# Altium PCB PCB1.PcbDoc
Units mil, origin at the board's own origin, x right, y up, seen from the top; angles counter-clockwise.
Board outline 6000 x 4000 mil, 2 copper layers (Top Layer, Bottom Layer); 22 components, 21 nets, 110 pads, 9 vias.
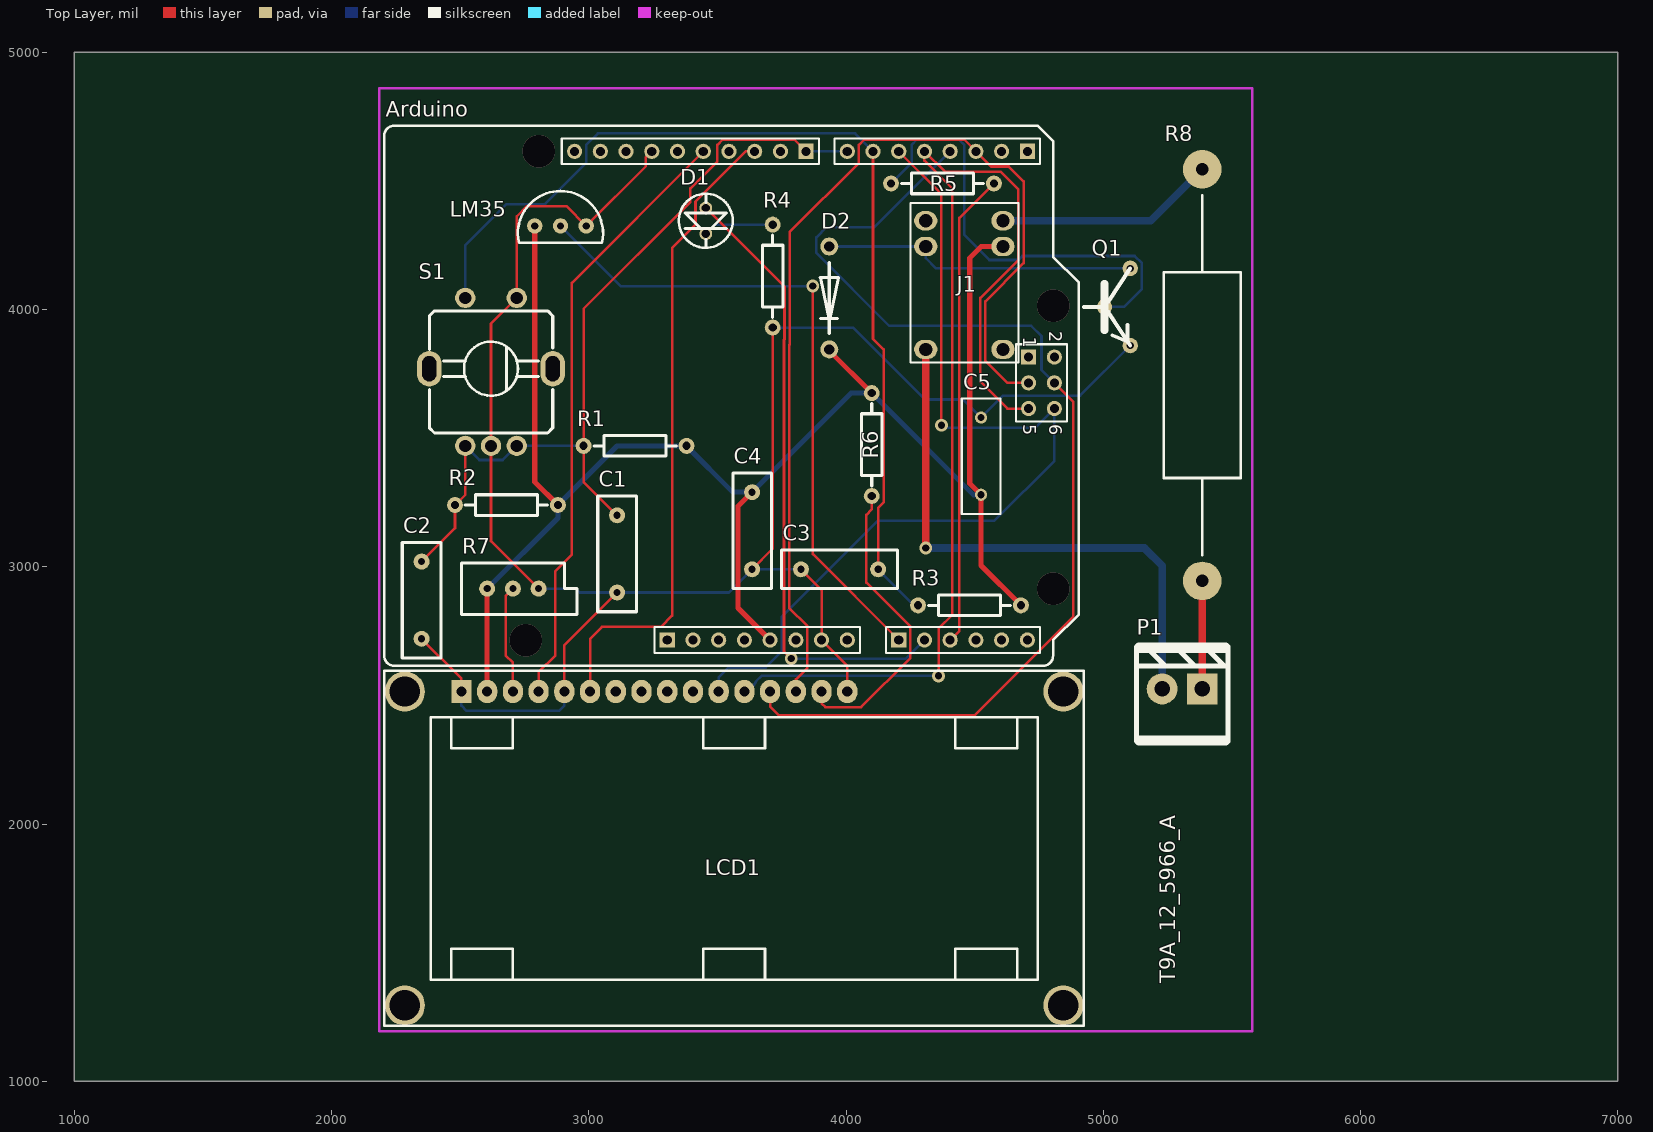
[diagram p0: Top Layer view]
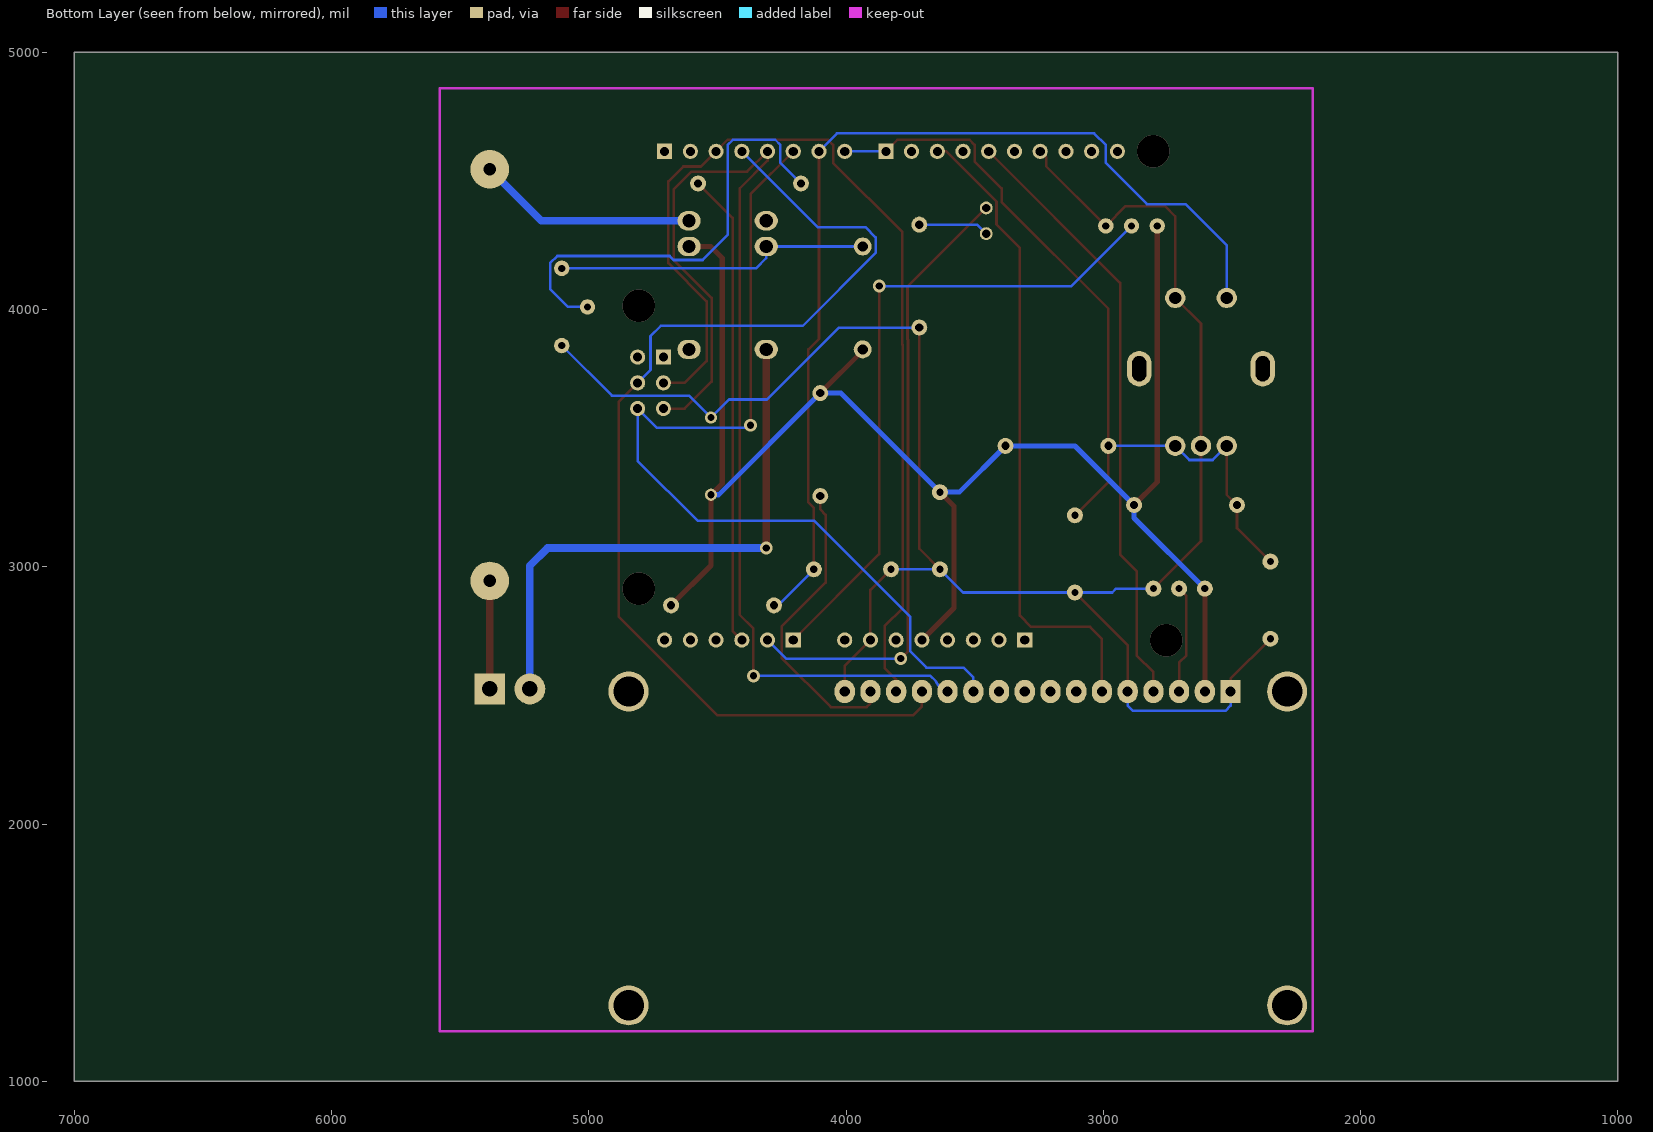
[diagram p1: Bottom Layer view, seen from below]

## Layer stack, top to bottom
Top Layer: signal copper 1.4
Dielectric: dielectric 12.6, FR-4, Dk 4.8
Bottom Layer: signal copper 1.4

## Board outline
1000,1000 7000,1000 7000,5000 1000,5000

## Design rules (kind name [scope] priority, off if disabled: settings)
Clearance [All] p1: gap=10
HoleSize [All] p1: absolutevalues=TRUE maxlimit=1000 minlimit=0 maxpercent=80.000 minpercent=20.000
PolygonConnect [All] p1: connectstyle=Relief reliefconductorwidth=10 reliefentries=4 polygonreliefangle="90 Angle"
RoomDefinition Sheet1 [InComponentClass('Sheet1')] p1: confinementstyle=ConfineIn formatcopy=TRUE lockcomponents=FALSE outline 2185,1195 5580,1195 5580,4860 2185,4860
RoutingVias [All] p1: holewidth=28 width=50 viastyle="Through Hole" minholewidth=28 minwidth=50 maxholewidth=28 maxwidth=50
SilkToSilkClearance [All] p1: silktosilkclearance=0
SilkscreenOverComponentPads SilkToSolderMaskClearance [IsPad] p1: minsilkscreentomaskgap=0
SolderMaskExpansion [All] p1: expansion=4
TestPointUsage FabricationTestPointUsage [All] p1: valid=0 allowmultiple=FALSE
Testpoint FabricationTestpoint [All] p1: side=3 testpointundercomponent=TRUE minsize=40 maxsize=100 preferedsize=60 minholesize=0 maxholesize=40 preferedholesize=32 testpointgrid=1 style=297 order=0123456789
Width Heat_GND [InNet('GND_HEAT')] p1: maxlimit=30 minlimit=10 preferedwidth=10 toplayer_minwidth=20 toplayer_prefwidth=30 bottomlayer_minwidth=20 bottomlayer_prefwidth=30 minimp=50.000000 maximp=50.000000 favimp=50.000000
Width Heat [InNet('HEAT')] p2: maxlimit=30 minlimit=10 preferedwidth=10 toplayer_minwidth=20 toplayer_prefwidth=30 bottomlayer_minwidth=20 bottomlayer_prefwidth=30 minimp=50.000000 maximp=50.000000 favimp=50.000000
Width 12V [InNet('12V')] p3: maxlimit=30 minlimit=10 preferedwidth=10 toplayer_minwidth=20 toplayer_prefwidth=30 bottomlayer_minwidth=20 bottomlayer_prefwidth=30 minimp=50.000000 maximp=50.000000 favimp=50.000000
Width 5V [InNet('ARDUINO_5V')] p4: maxlimit=20 minlimit=10 preferedwidth=10 toplayer_minwidth=15 toplayer_prefwidth=20 bottomlayer_minwidth=15 bottomlayer_prefwidth=20 minimp=50.000000 maximp=50.000000 favimp=50.000000
Width GND [InNet('GND')] p5: maxlimit=20 minlimit=10 preferedwidth=10 toplayer_minwidth=15 toplayer_prefwidth=20 bottomlayer_minwidth=15 bottomlayer_prefwidth=20 minimp=50.000000 maximp=50.000000 favimp=50.000000
Width [All] p6: maxlimit=10 minlimit=10 preferedwidth=10
21 further rules are at their usual default settings.

## Components (designator, comment, footprint, x,y, rotation, side; value= is the part's Value field where it differs from the comment)
Arduino "Arduino" Arduino-UNO 3845,3665 r0 top
C1 "Cap" RAD-0.3#1 3110,3200 r270 top
C2 "Cap" RAD-0.3#1 2350,3020 r270 top
C3 "Cap" RAD-0.3#1 3825,2990 r0 top
C4 "Cap" RAD-0.3#1 3635,2990 r90 top
C5 "Cap" RAD-0.3#2 4525,3430 r90 top
D1 "LED" LEDLXH-5 3455,4395 r0 top
D2 "DIODE" DIODE-4 3935,4245 r270 top
J1 "HK4100F" HK4100F 4460,4145 r0 top
LCD1 "LCD1602" LCD1602 2505,2515 r0 top
LM35 "LM35" LM35 2790,4325 r90 top
P1 "Header 2" "POWER PLUG2" 5385,2525 r0 top
Q1 "NPN" NPN-2 5105,3860 r0 top
R1 "Res2" AXIAL-0.4 3380,3470 r180 top
R2 "Res2" AXIAL-0.4 2880,3240 r180 top
R3 "Res2" AXIAL-0.4 4280,2850 r0 top
R4 "Res2" AXIAL-0.4 3715,4330 r270 top
R5 "Res2" AXIAL-0.4 4175,4490 r0 top
R6 "Res2" AXIAL-0.4 4100,3275 r90 top
R7 "10K" VR-5 2605,2915 r0 top
R8 "Heat" AXIAL4cm 5385,4545 r270 top
S1 "SW-EC11" EC11 2620,3770 r0 top

## Footprints (in the part's own frame and the unit in brackets; to place one, negate y for a bottom-side part, rotate by r counter-clockwise, add the part's x,y. Pads: shape width x height; smd on the part's side, far side on the other; paste and mask are expansions set on the pad)
Arduino-UNO [mm] "Arduino板"
  rect 1.5x1.5 hole 0.9: 1(21.844,24.13) 1(21.971,3.81) 9(0,24.13) 19(-13.716,-24.13) 27(9.144,-24.13)
  round 1.5 hole 0.9: 2(19.304,24.13) 2(24.511,3.81) 3(16.764,24.13) 3(21.971,1.27) 4(14.224,24.13) 4(24.511,1.27) 5(11.684,24.13) 5(21.971,-1.27) 6(9.144,24.13) 6(24.511,-1.27) 7(6.604,24.13) 8(4.064,24.13) 10(-2.54,24.13) 11(-5.08,24.13) 12(-7.62,24.13) 13(-10.16,24.13) 14(-12.7,24.13) 15(-15.24,24.13) 16(-17.78,24.13) 17(-20.32,24.13) 18(-22.86,24.13) 20(-11.176,-24.13) 21(-8.636,-24.13) 22(-6.096,-24.13) 23(-3.556,-24.13) 24(-1.016,-24.13) 25(1.524,-24.13) 26(4.064,-24.13) 28(11.684,-24.13) 29(14.224,-24.13) 30(16.764,-24.13) 31(19.304,-24.13) 32(21.844,-24.13)
  silkscreen extent -41.66,-26.67 26.92,26.67
AXIAL4cm [mil] "加热大电阻"
  round 150 hole 48: 1(0,0) 2(1600,0)
  silkscreen extent 100,-150 1500,150
AXIAL-0.4 [mil]
  round 62 hole 32: 1(0,0) 2(400,0)
  silkscreen extent 40,-40 360,40
DIODE-4 [mil]
  round 70 hole 40: 1(0,0) 2(400,0)
  silkscreen extent 63,-35 338,36
EC11 [mm] "旋转编码器"
  round 2 hole 1.2: 1(-2.54,-7.62) 2(0,-7.62) 3(2.54,-7.62) 4(2.54,6.985) 5(-2.54,6.985)
  oval 2.4x3.5 hole 1.4 slot 2.5 at 90 deg: 6(-6.096,0) 7(6.096,0)
  silkscreen extent -6.1,-6.35 6.1,5.71
HK4100F [mm] "继?"
  oval 2.3x1.9 hole 1.3: 1(-3.81,5.08) 2(-3.81,2.54) 3(-3.81,-7.62) 4(3.81,-7.62) 5(3.81,2.54) 6(3.81,5.08)
  silkscreen extent -5.33,-8.89 5.33,6.86, body extent -5.33,-8.89 5.33,6.86, height 12
LCD1602 [mm] "1602液晶屏"
  round 3.962 hole 3: 0(-5.588,-30.988) 0(-5.588,0) 0(59.436,-30.988) 0(59.436,0)
  rect 2x2.3 hole 1: 1(0,0)
  oval 2x2.3 hole 1: 2(2.54,0) 3(5.08,0) 4(7.62,0) 5(10.16,0) 6(12.7,0) 7(15.24,0) 8(17.78,0) 9(20.32,0) 10(22.86,0) 11(25.4,0) 12(27.94,0) 13(30.48,0) 14(33.02,0) 15(35.56,0) 16(38.1,0)
  silkscreen extent -7.62,-33.02 61.47,2.03
LEDLXH-5 [mil]
  round 50 hole 32: 1(0,0) 2(0,-100)
  silkscreen extent -105,-155 105,55
LM35 [mil]
  round 60 hole 28: 1(0,0) 2(0,-100) 3(0,-200)
  silkscreen extent -65,-266 136,66
NPN-2 [mil]
  round 60 hole 28: 1(0,0) 2(-100,150) 3(0,300)
  silkscreen extent -180,0 0,300
"POWER PLUG2" [mil] "单电源插座"
  rect 120x120 hole 60: 1(0,0)
  round 120 hole 60: 2(-156,0)
  silkscreen extent -255,-204 100,164
RAD-0.3#1 [mil]
  round 62 hole 28: 1(0,0) 2(300,0)
  silkscreen extent -75,-75 375,75
RAD-0.3#2 [mil] "Capacitor; 2 Leads"
  round 47.24 hole 27.56: 1(-150,0) 2(150,0)
  silkscreen extent -225,-75 225,75
VR-5 [mil]
  round 62 hole 28: 1(0,0) 2(200,0) 3(100,0)
  silkscreen extent -100,-100 350,100

## Part data
Arduino: library part Arduino-UNO
C1 C2 C3 C4 C5: "Capacitor"
D1: library part LEDLXH, "发光二极管"
D2: library part DIODELXH, "Diode"
J1: "单刀双掷继电器"
LM35: "LM35温度传感器"
P1: "Header, 2-Pin"
Q1: library part NPNLXH, "NPN Transistor"
R1 R2 R3 R4 R5 R6: "Resistor"
R7: library part POT1, "Potentiometer"
R8: library part Res2, "Resistor"
S1: "旋转编码开关"

## Via types
v1: diameter 50, hole 28, Top Layer to Bottom Layer, 5 vias
v2: diameter 125.98, hole 125.98, Top Layer to Bottom Layer, 4 vias

## Nets (pads, with @x,y where several pads share a name; then routed paths per layer and width w, separated by ;. In a path a pad name is that pad's centre, name@x,y a point inside that pad or via, vN(x,y) a via of type N, cw(c..) or ccw(c..) an arc to the next point about the centre after c; other vN are vias at no path point)
12V: P1.1 R8.2 | length 420
  Top Layer w30: P1.1 R8.2
A: Arduino.8 Arduino.9 C1.1 C2.1 R1.2 R2.2 S1.1 S1.3 | length 3267.1
  Top Layer w10: C2.1 2480,3150 R2.2 2520,3280 S1.1 ; C1.1 2980,3330 R1.2 2980,4003 3395,4418 3395,4470.96 3500,4575.96 3500,4640 3520,4660 3800,4660 Arduino.9
  Bottom Layer w10: S1.1 2575,3415 2665,3415 S1.3 R1.2 ; Arduino.9 Arduino.8
A0: Arduino.27 LM35.2 | length 2592.3
  Top Layer w10: v1(3871,4091) 3871,3049 Arduino.27
  Bottom Layer w10: LM35.2 3124,4091 v1(3871,4091)
A1: Arduino.28 D1.1 | length 2439
  Top Layer w10: D1.1 3761,4089 3761,3884 3759,3882 3759,2671 v1(3787,2643)
  Bottom Layer w10: v1(3787,2643) 4233,2643 Arduino.28
A2: Arduino.29 R5.2 | length 1845.4
  Top Layer w10: Arduino.29 4441,2751 4441,4356 R5.2
ARDUINO_5V: Arduino.23 C4.2 C5.1 D2.2 J1.5 LCD1.2 LM35.1 R1.1 R2.1 R3.2 R6.2 R7.1 | length 6567.1
  Top Layer w20: LCD1.2 R7.1 ; LM35.1 2790,3330 R2.1 ; C4.2 3580,3235 3580,2840 Arduino.23 ; D2.2 3935,3840 R6.2 ; J1.5 4526,4245 4481,4200 4481,3324 C5.1 4525,3005 R3.2
  Bottom Layer w20: R7.1 2880,3190 R2.1 3110,3470 R1.1 3560,3290 C4.2 4020,3675 R6.2 4495,3280 C5.1
BL+: LCD1.15 R6.1 | length 1185.9
  Top Layer w10: LCD1.15 3905,2469 3920,2454 4059,2454 4250,2645 4250,2767 4079,2938 4079,3202 4100,3223 R6.1
BL-: Arduino.15 Arduino.25 C1.2 C2.2 C3.1 C4.1 C5.2 LCD1.1 LCD1.5 LCD1.16 LM35.3 Q1.1 R4.2 R7.2 S1.2 S1.4 | length 7782
  Top Layer w10: C2.2 2505,2565 LCD1.1 ; R7.2 2620,3100 S1.2 2620,3945 S1.4 2720,4362 2760,4402 2913,4402 LM35.3 3222,4557 3222,4592 Arduino.15 ; LCD1.5 2905,2695 C1.2 ; C4.1 3715,3070 R4.2 ; C3.1 3905,2910 Arduino.25 4005,2615 LCD1.16
  Bottom Layer w10: LCD1.1 2505,2460 2525,2440 2885,2440 2905,2460 LCD1.5 ; R7.2 2950,2915 2965,2900 C1.2 3545,2900 C4.1 C3.1 ; R4.2 4028,3930 4307.89,3650.11 4454.89,3650.11 C5.2 4610,3665 4910,3665 Q1.1
D2: Arduino.3 LCD1.14 | length 3963.4
  Top Layer w10: LCD1.14 3805,2562 3850,2607 3850,2769 3779,2840 3779,3862 3781,3864 3781,4301 4050,4570 4050,4640 4070,4660 4460,4660 4505,4615 4564,4556 4632,4556 4690.28,4497.72 4690.28,4180.28 4542,4032 4542,3800 4627,3715 Arduino.3@4710,3715
D3: Arduino.4 LCD1.13 | length 4279.6
  Top Layer w10: LCD1.13 3705,2457 3740,2422 4500,2422 4883,2805 4883,3642 Arduino.4@4810,3715
  Bottom Layer w10: Arduino.4@4405,4615 4110,4320 3925,4320 3885,4280 3885,4220 4168,3937 4720,3937 4760,3897 4760,3765 Arduino.4@4810,3715
D4: Arduino.5 LCD1.12 | length 4357.8
  Top Layer w10: v1(4360,2576) 4360,2760 4413,2813 4413,4471 4305,4579 4305,4615 4384,4536 4600,4536 4670.28,4465.72 4670.28,4193.28 4522,4045 4522,3720 4627,3615 Arduino.5@4710,3615
  Bottom Layer w10: LCD1.12 3627,2515 3651,2555 3672,2576 v1(4360,2576)
D5: Arduino.6 LCD1.11 | length 3597.4
  Top Layer w10: Arduino.6@4205,4615 4371,4449 v1(4371,3550)
  Bottom Layer w10: LCD1.11 3505,2570 3542.92,2607.92 3686.92,2607.92 3750,2671 3750,2805 4124,3179 4577,3179 4810,3412 4810,3615 4736,3541 4380,3541 v1(4371,3550)
D6: Arduino.7 C3.2 R3.1 S1.5 | length 3903.9
  Top Layer w10: Arduino.7 4105,3886 4146,3845 4146,3250 4125,3229 C3.2
  Bottom Layer w10: S1.5 2520,4250 2680,4410 2830,4410 2990,4570 2990,4640 3035,4685 4035,4685 Arduino.7 ; C3.2 4265,2850 R3.1
D10: Arduino.11 LCD1.6 | length 2519.7
  Top Layer w10: LCD1.6 3005,2720 3051,2766 3280,2766 3324,2810 3324,4240 3415,4331 3415,4420 3610,4615 Arduino.11
D12: Arduino.13 LCD1.4 | length 2365.1
  Top Layer w10: LCD1.4 2805,2590 2870,2655 2870,2983 2934,3047 2934,4104 Arduino.13
GND_HEAT: J1.3 P1.2 | length 2198.6
  Top Layer w30: v1(4310,3073) J1.3
  Bottom Layer w30: v1(4310,3073) 5160,3073 5229,3004 P1.2
HEAT: J1.6 R8.1 | length 857.8
  Bottom Layer w30: J1.6 5185,4345 R8.1
NetD1_2: D1.2 R4.1 | length 274.5
  Bottom Layer w10: D1.2 3490,4330 R4.1
NetD2_1: D2.1 J1.2 Q1.3 | length 1231.6
  Bottom Layer w10: D2.1 J1.2 4310,4200 4350,4160 Q1.3
NetQ1_2: Q1.2 R5.1 | length 1777
  Bottom Layer w10: R5.1 4255,4570 4255,4640 4275,4660 4440,4660 4460,4640 4460,4290 4557.4,4192.6 4670,4192.6 4685.4,4208 5122,4208 5150,4180 5150,4080 5080,4010 Q1.2
VO: LCD1.3 R7.3 | length 423.2
  Top Layer w10: LCD1.3 2705,2627 2677,2655 2677,2887 R7.3
pads on no net: Arduino.1 Arduino.2 Arduino.10 Arduino.12 Arduino.14 Arduino.16 Arduino.17 Arduino.18 Arduino.19 Arduino.20 Arduino.21 Arduino.22 Arduino.24 Arduino.26 Arduino.30 Arduino.31 Arduino.32 J1.1 J1.4 LCD1.0 LCD1.7 LCD1.8 LCD1.9 LCD1.10 S1.6 S1.7
copper on no net:
  other v2: 2755,2715 4805,2915 4805,4015 2805,4615

## Keep-outs
Keep-Out Layer:
  lines w10: 2185,1195 2185,4860 5580,4860 5580,1195 2185,1195

## Silkscreen, mask and mechanical layers (free items; w line width, h text height)
Top Overlay:
  text "T9A_12_5966_A" at 5280,1380 h60 r90

## Text inside footprints (layer, text, board x,y; h text height)
Arduino: Top Overlay "1" at 4690,3895 h50 r270; Top Overlay "2" at 4790,3915 h50 r270; Top Overlay "5" at 4690,3555 h50 r270; Top Overlay "6" at 4790,3555 h50 r270